# Altium PCB Sensor_Glove-X01.PcbDoc (part 1 of 4)
Units mm, origin at the board's own origin, x right, y up, seen from the top; angles counter-clockwise.
Board outline 58.67 x 37.59 mm, 2 copper layers (Top Layer, Bottom Layer), stack 1.711 mm thick; 126 components, 71 nets, 384 pads, 113 vias.
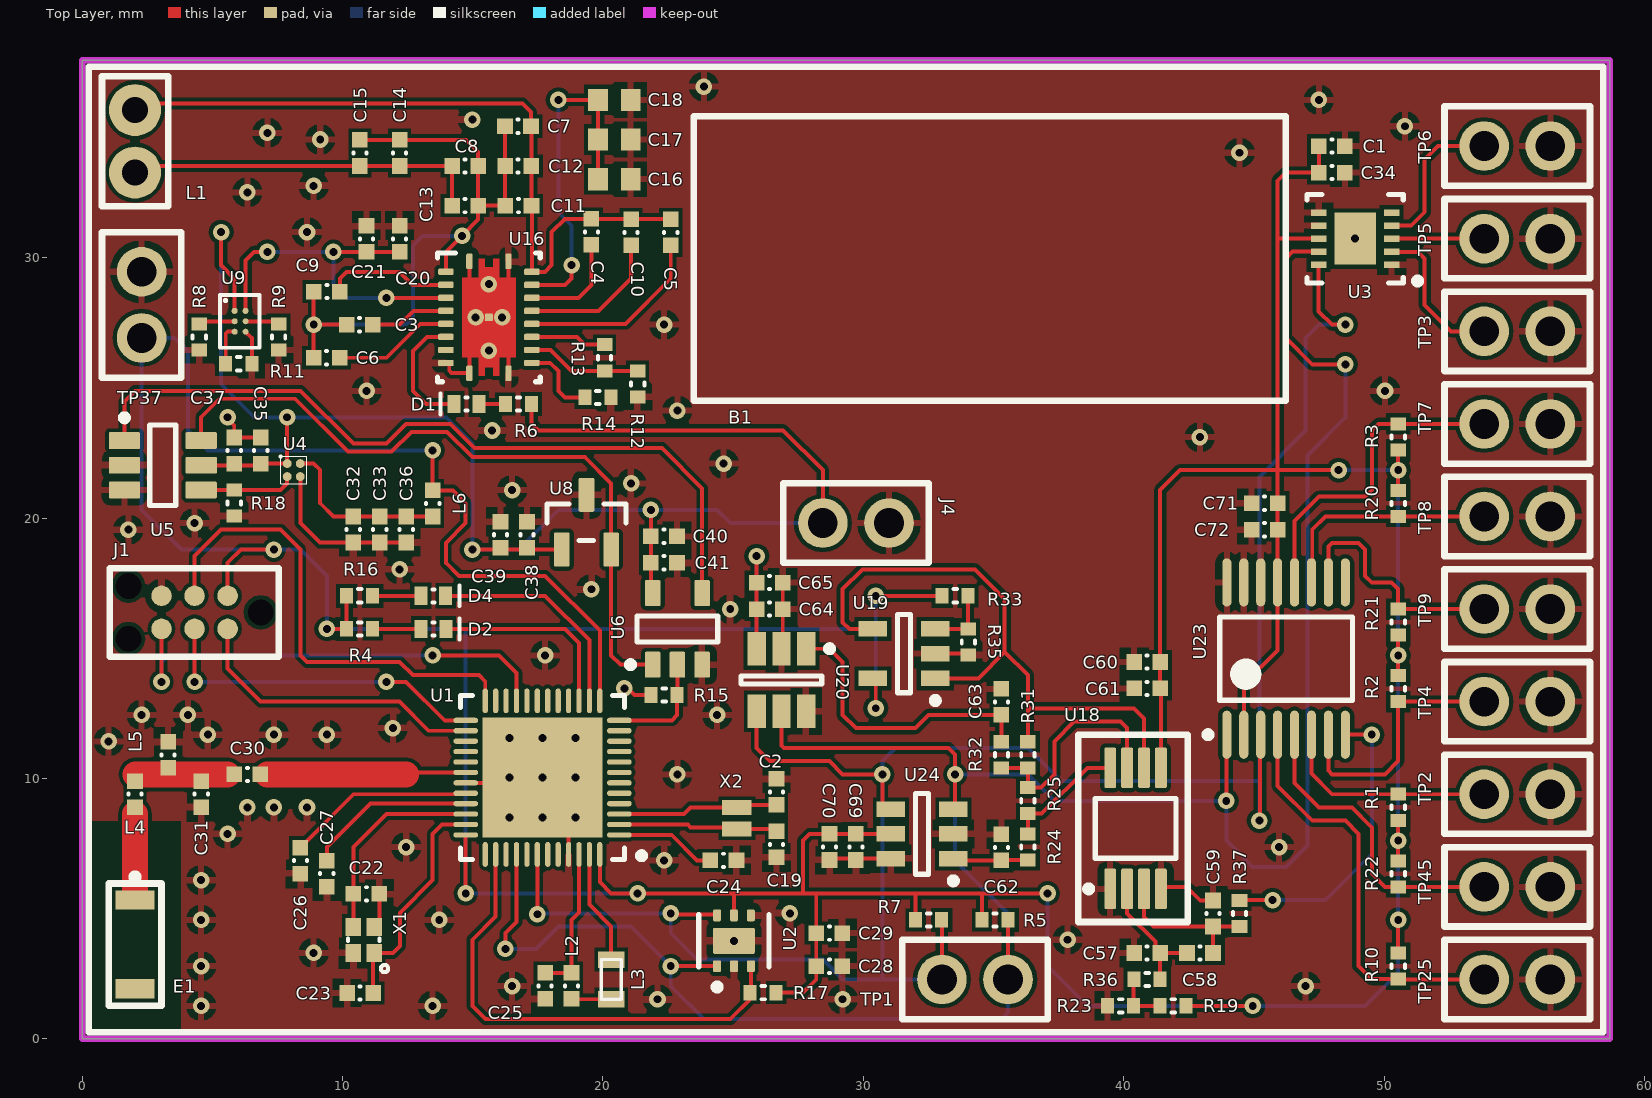
[diagram p0: Top Layer view]
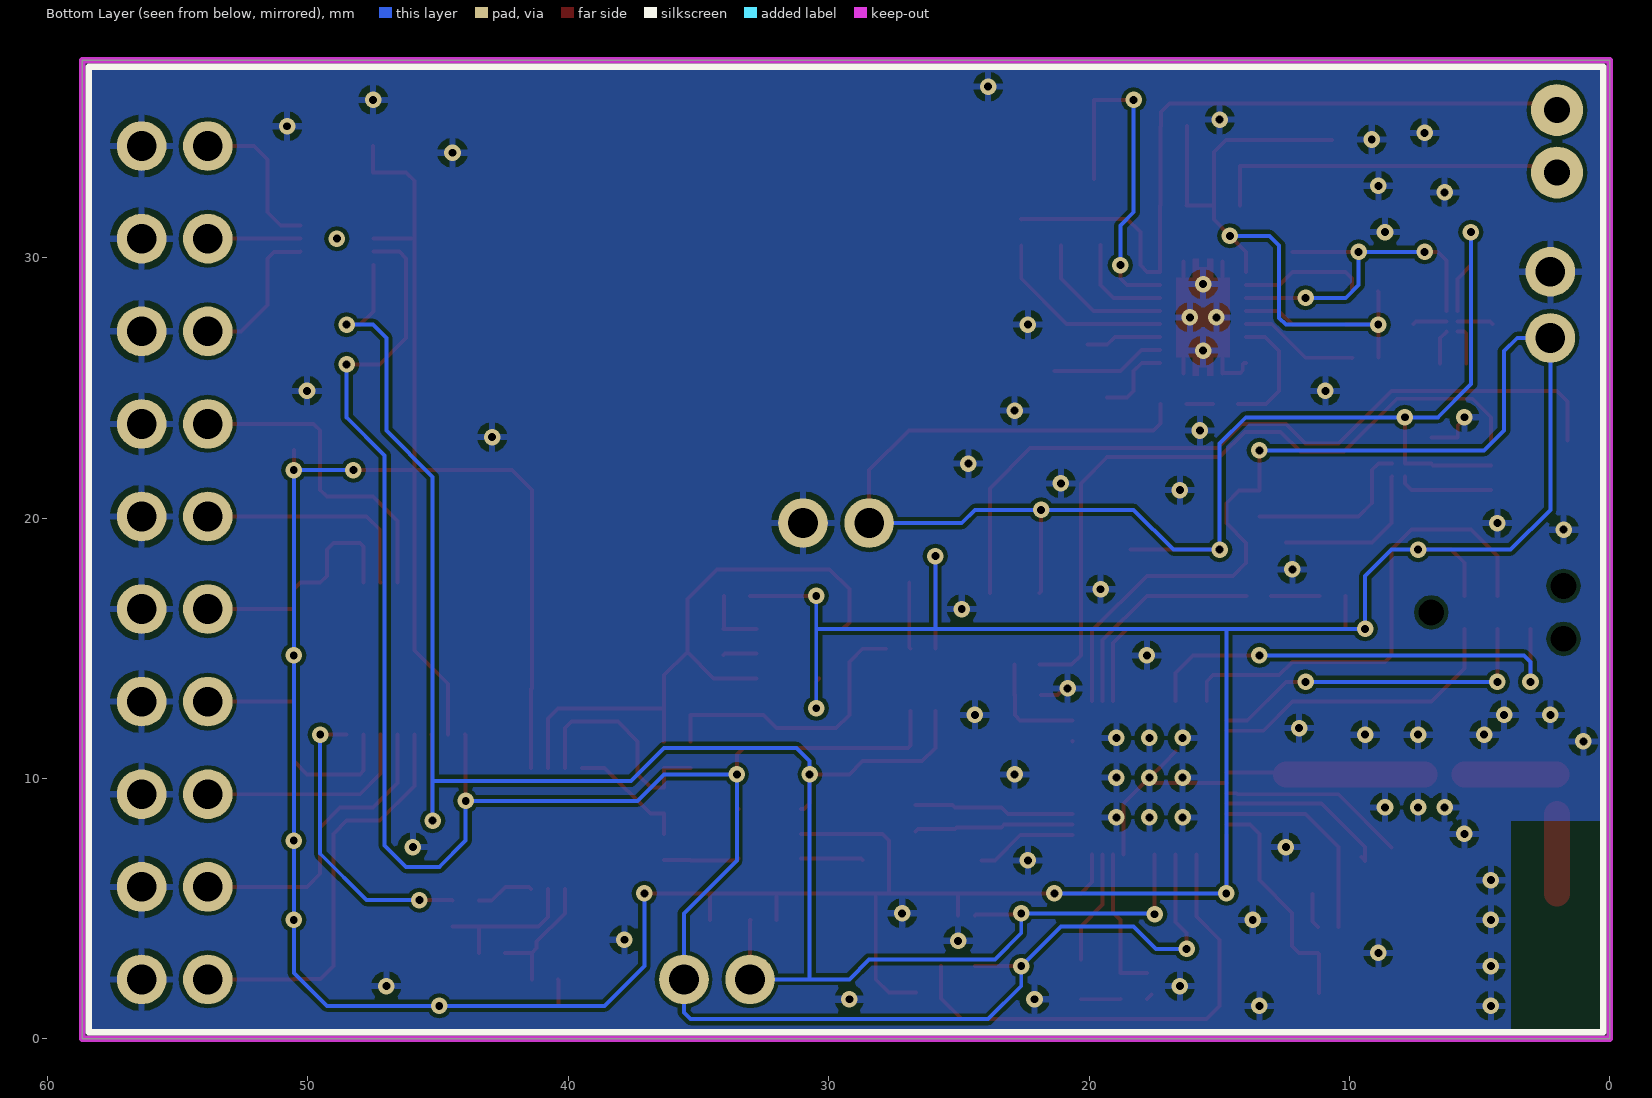
[diagram p1: Bottom Layer view, seen from below]
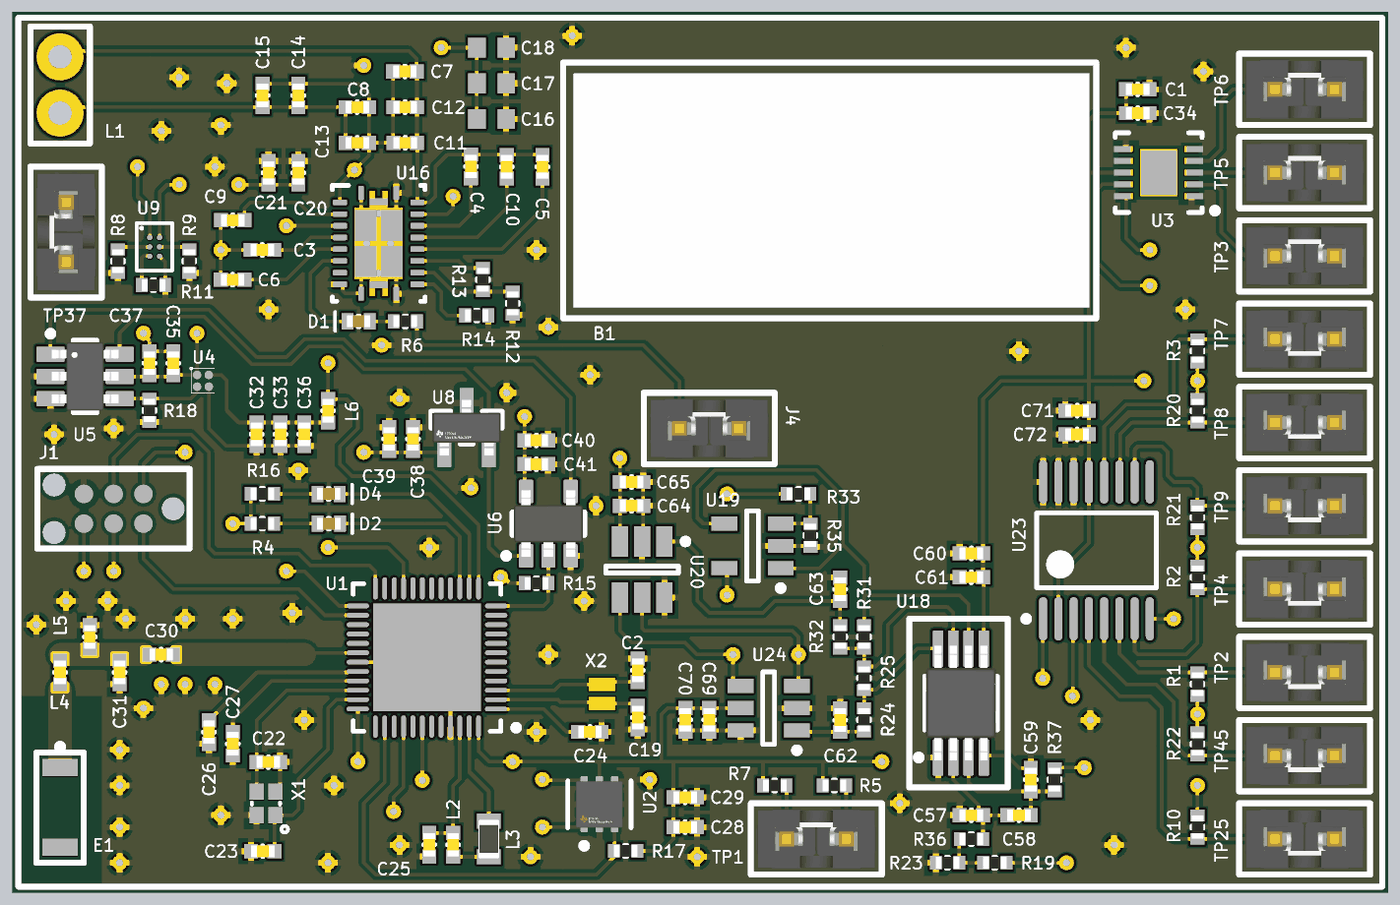
[diagram p3: 3D render of the assembled board from above, using the file's embedded part models]

## Layer stack, top to bottom
Top Solder: solder mask 0.0254, SM-001, Dk 4
Top Layer: signal copper 0.035
Dielectric 2: prepreg 0.0711, PP-006, Dk 4.1
Dielectric 1: core 1.4986, Core-043, Dk 4.3
Dielectric 3: prepreg 0.0711, PP-006, Dk 4.1
Bottom Layer: signal copper 0.035
Bottom Solder: solder mask 0.0254, SM-001, Dk 4

## Board outline
0,0 58.674,0 58.674,37.592 0,37.592

## Design rules (kind name [scope] priority, off if disabled: settings)
Clearance [All] p1: gap=0.152 ignorepadtopadclearanceinfootprint=FALSE
ComponentClearance [All] p1: gap=0.381 collisioncheckmode=3 verticalgap=0.254 showdistances=FALSE
HoleSize [All] p1: absolutevalues=TRUE maxlimit=5.08 minlimit=0.305 maxpercent=80.000 minpercent=20.000
MinimumSolderMaskSliver [All] p1: minsoldermaskwidth=0.152
PolygonConnect [All] p1: connectstyle=Relief reliefconductorwidth=0.254 reliefentries=4 polygonreliefangle="90 Angle" airgapwidth=0.254
RoutingVias [All] p1: holewidth=0.406 width=0.762 viastyle="Through Hole" minholewidth=0.305 minwidth=0.305 maxholewidth=2.54 maxwidth=1.27
SilkToSilkClearance [All] p1: silktosilkclearance=0.152
SilkToSolderMaskClearance [IsPad] p1: minsilkscreentomaskgap=0.152 clearancetoexposedcopper=TRUE
SolderMaskExpansion [All] p1: expansion=0.102 istentingtop=FALSE
UnRoutedNet [All] p1: checkbadconnections=TRUE
Width [All] p1: maxlimit=1.27 minlimit=0.152 preferedwidth=0.152
24 further rules are at their usual default settings.

## Classes and differential pairs
component class Sensor_Glove_Pheripherals-X01: C1 C34 TP3 TP5 TP6 U2 U3
component class Sensor_Glove_Sensors-X01: C57 C58 C59 C60 C61 C62 C63 C64 C65 C69 C70 C71 C72 R1 R2 R3 R10 R19 R20 R21 R22 R23 R24 R25 R31 R32 R33 R35 R36 R37 TP2 TP4 TP7 TP8 TP9 TP25 TP45 U18 U19 U20 U23 U24
component class Sensor_Glove_Power-X01: B1 C3 C4 C5 C6 C7 C8 C9 C10 C11 C12 C13 C14 C15 C16 C17 C18 C20 C21 C32 C33 C35 C36 C37 C38 C39 C40 C41 D1 J4 L1 L6 R6 R8 R9 R11 R12 R13 R14 R15 R18 TP37 U4 U5 U6 U8 U9 U16
component class Sensor_Glove_Main-X01: C2 C19 C22 C23 C24 C25 C26 C27 C28 C29 C30 C31 D2 D4 E1 J1 L2 L3 L4 L5 R4 R5 R7 R16 R17 TP1 U1 X1 X2

## Components (designator, comment, footprint, x,y, rotation, side; value= is the part's Value field where it differs from the comment)
B1 "40 mAh BATTERY" BATTERY 34.798,29.972 r270 top
C1 "1uF" C0402 47.998,34.29 r0 top
C2 "14pF" C0402 26.67,9.488 r270 top
C3 "470nF" C0402 10.66,27.432 r0 top
C4 "10nF" C0402 19.558,30.996 r270 top
C5 "22nF" C0402 22.606,30.98 r270 top
C6 "22nF" C0402 9.39,26.162 r0 top
C7 "68pF" C0402 16.74,35.052 r0 top
C8 "100nF" C0402 14.708,33.528 r0 top
C9 "10nF" C0402 9.398,28.702 r0 top
C10 "470nF" C0402 21.082,30.98 r270 top
C11 "2nF" C0402 16.756,32.004 r0 top
C12 "100pF" C0402 16.748,33.528 r0 top
C13 "10nF" C0402 14.708,32.004 r0 top
C14 "100nF" C0402 12.192,34.028 r90 top
C15 "4.7nF" C0402 10.668,34.028 r90 top
C16 "10uF" C0603 20.437,33.02 r0 top
C17 "10uF" C0603 20.437,34.544 r0 top
C18 "100nF" C0603 20.437,36.068 r0 top
C19 "14pF" C0402 26.67,7.472 r90 top
C20 "4.7uF" C0402 12.192,30.726 r270 top
C21 "4.7uF" C0402 10.922,30.726 r270 top
C22 "12pF" C0402 10.914,5.572 r0 top
C23 "12pF" C0402 10.676,1.762 r180 top
C24 "100nF" C0402 24.63,6.858 r0 top
C25 "1uF" C0402 17.78,2.04 r90 top
C26 "100pF" C0402 8.382,6.85 r270 top
C27 "100pF" C0402 9.398,6.35 r270 top
C28 "4.7uF" C0402 28.694,2.794 r0 top
C29 "100nF" C0402 28.694,4.064 r180 top
C30 "0.5pF" C0402 6.342,10.16 r180 top
C31 "2pF" C0402 4.572,9.398 r270 top
C32 "4.7uF" C0402 10.414,19.566 r270 top
C33 "1uF" C0402 11.43,19.566 r270 top
C34 "100nF" C0402 47.998,33.274 r0 top
C35 "1uF" C0402 6.858,22.598 r90 top
C36 "100nF" C0402 12.446,19.566 r90 top
C37 "100nF" C0402 5.842,22.598 r270 top
C38 "1uF" C0402 17.084,19.364 r90 top
C39 "100nF" C0402 16.068,19.364 r270 top
C40 "1uF" C0402 22.344,19.304 r0 top
C41 "100nF" C0402 22.344,18.288 r180 top
C57 "" C0402 40.902,3.302 r0 top
C58 "100nF" C0402 42.934,3.302 r0 top
C59 "" C0402 43.434,4.818 r90 top
C60 "1uF" C0402 40.902,14.478 r180 top
C61 "100nF" C0402 40.902,13.462 r180 top
C62 "100nF" C0402 35.306,7.358 r90 top
C63 "1uF" C0402 35.306,12.946 r90 top
C64 "1uF" C0402 26.408,16.51 r0 top
C65 "100nF" C0402 26.408,17.526 r0 top
C69 "1uF" C0402 29.718,7.374 r270 top
C70 "100nF" C0402 28.702,7.374 r270 top
C71 "1uF" C0402 45.414,20.574 r180 top
C72 "100nF" C0402 45.414,19.558 r180 top
D1 "Yellow" LED_0402 14.765,24.384 r180 top
D2 "Orange" LED_0402 13.495,15.748 r0 top
D4 "Red" LED_0402 13.487,17.018 r0 top
E1 "2450AT18B100" 2450AT18B100 2.032,5.334 r270 top
J1 "J-LINK 6-PIN NEEDLE ADAPTER" "J-LINK 6 PIN NEEDLE" 6.858,16.383 r180 top
J4 "JUMPER WITH 40 mAh BATTERY" JUMPER_BATTERY 28.448,19.812 r0 top
L1 "WIRELESS CHARGING COIL, RECEIVER" 760308101219 2.032,35.674 r0 top
L2 "15nH" L0402 18.796,2.04 r270 top
L3 "10uH" L0603 20.32,2.286 r90 top
L4 "9nH" L0402 2.032,9.398 r270 top
L5 "2nH" L0402 3.302,10.914 r270 top
L6 "1uH" L0402 13.462,20.566 r90 top
R1 "" R0402 50.546,8.898 r90 top
R2 "" R0402 50.546,13.454 r270 top
R3 "" R0402 50.546,23.122 r90 top
R4 "422R" R0402 10.66,15.748 r0 top
R5 "3.3kR" R0402 35.06,4.572 r0 top
R6 "464R" R0402 16.756,24.384 r0 top
R7 "3.3kR" R0402 32.512,4.572 r0 top
R8 "10kR" R0402 4.499,26.955 r90 top
R9 "3.3kR" R0402 7.547,26.955 r90 top
R10 "" R0402 50.546,2.794 r270 top
R11 "10kR" R0402 6.015,25.931 r180 top
R12 "10kR" R0402 21.336,25.154 r270 top
R13 "20kR" R0402 20.066,26.162 r270 top
R14 "2kR" R0402 19.804,24.638 r0 top
R15 "1MR" R0402 22.352,13.208 r0 top
R16 "422R" R0402 10.66,17.018 r0 top
R17 "3.3kR" R0402 26.154,1.778 r180 top
R18 "1MR" R0402 5.842,20.582 r270 top
R19 "" R0402 41.902,1.27 r180 top
R20 "" R0402 50.546,20.566 r270 top
R21 "" R0402 50.546,16.01 r90 top
R22 "" R0402 50.546,6.342 r270 top
R23 "" R0402 39.886,1.27 r180 top
R24 "0mR" R0402 36.322,7.374 r270 top
R25 "" R0402 36.322,9.152 r270 top
R31 "" R0402 36.322,10.914 r270 top
R32 "0mR" R0402 35.306,10.914 r90 top
R33 "100kR" R0402 33.528,17.018 r0 top
R35 "100kR" R0402 34.036,15.248 r270 top
R36 "0mR" R0402 40.902,2.286 r0 top
R37 "0mR" R0402 44.45,4.818 r270 top
TP1 "JUMPER" JUMPER 33.02,2.286 r0 top
TP2 "JUMPER" JUMPER 56.388,9.398 r180 top
TP3 "JUMPER" JUMPER 53.848,27.178 r0 top
TP4 "JUMPER" JUMPER 56.388,12.954 r180 top
TP5 "JUMPER" JUMPER 53.848,30.734 r0 top
TP6 "JUMPER" JUMPER 53.848,34.29 r0 top
TP7 "JUMPER" JUMPER 56.388,23.622 r180 top
TP8 "JUMPER" JUMPER 56.388,20.066 r180 top
TP9 "JUMPER" JUMPER 56.388,16.51 r180 top
TP25 "JUMPER" JUMPER 56.388,2.286 r180 top
TP37 "JUMPER" JUMPER 2.286,26.924 r90 top
TP45 "JUMPER" JUMPER 56.388,5.842 r180 top
U1 "NRF52832-QFAA-R7" NRF52832-QFAA-R7 17.682,10.036 r0 top
U2 "TMP117AIDRVR" TMP117AIDRVR 25.034,3.769 r0 top
U3 "4 CHANNEL CDC" "WSON-10 3X3MM" 48.892,30.734 r180 top
U4 "ADP160" ADP160 8.124,21.848 r0 top
U5 "SN74LVC1G57DBVR" DBV0006A_M 3.097,22.032 r0 top
U6 "SN74LVC1G80DBVR" DBV0005A_N 22.86,15.748 r90 top
U8 "DRV5032FBDBZR" FP-DBZ0003A-MFG 19.37,19.846 r90 top
U9 "BQ25100YFPT" YZP0006 6.057,27.563 r0 top
U16 "BQ51013BRHLR" BQ51013BRHLR 15.622,27.714 r270 top
U18 "Instrumentation Amplifier" 8-MSOP 40.457,8.089 r90 top
U19 "AD8505ARJZ-R7" ADI-RJ-5_N 31.566,14.798 r180 top
U20 "DAC5571IDBVT" TI-DBV6_M 26.858,13.786 r270 top
U23 "ADG728BRUZ" ADI-RU-16_M 46.239,14.609 r90 top
U24 "ADS1100A1IDBVT" TI-DBV6_N 32.258,7.874 r180 top
X1 "32MHz" CRYSTAL_1MM6_X_1MM2 10.814,3.802 r90 top
X2 "32.768 kHz" CRYSTAL_1MM2_X_1MM0 25.146,8.48 r270 top

## Footprints (in the part's own frame and the unit in brackets; to place one, negate y for a bottom-side part, rotate by r counter-clockwise, add the part's x,y. Pads: shape width x height; smd on the part's side, far side on the other; paste and mask are expansions set on the pad)
8-MSOP [mm] "TSOP, 8-Leads, Body 3.1x3.1mm, Pitch 0.65mm, IPC Low Density"
  rrect22% 1.55x0.45 smd: 1(-2.325,0.975) 2(-2.325,0.325) 3(-2.325,-0.325) 4(-2.325,-0.975) 5(2.325,-0.975) 6(2.325,-0.325) 7(2.325,0.325) 8(2.325,0.975)
  silkscreen extent -3.6,-2 3.6,2.2, body extent -2.45,-1.5 2.45,1.5, height 0.94
2450AT18B100 [mm] "2.4GHz Mini Antenna SMD, 50 ohm Resistence"
  rect 0.74x1.5 smd mask+0.03: 1(0,0) 2(3.406,0)
  silkscreen extent -1.02,-1.02 4.06,1.02, body extent -0.05,-0.9 3.35,0.9, height 1.4
760308101219 [mm] "WE-WPCC WIRELESS POWER TRANSFER RECEIVER COIL"
  round 2 hole 1: 1(0,0) 2(0,-2.4)
  silkscreen extent -1.27,-3.7 1.27,1.3
ADI-RJ-5_N [mm] "SOT-23, 5-Leads, Body 2.9x1.6mm, Pitch 0.95mm, IPC Medium Density"
  rect 1.1x0.6 smd: 1(-1.2,0.95) 2(-1.2,0) 3(-1.2,-0.95) 4(1.2,-0.95) 5(1.2,0.95)
  silkscreen extent -1.33,-1.5 0.25,1.92, body extent -0.85,-1.5 0.85,1.5, height 1.45
ADI-RU-16_M [mm] "SOP, 16-Leads, Body 5x4.4mm, Pitch 0.65mm, IPC Low Density"
  oval 1.85x0.35 smd: 1(-2.925,2.275) 2(-2.925,1.625) 3(-2.925,0.975) 4(-2.925,0.325) 5(-2.925,-0.325) 6(-2.925,-0.975) 7(-2.925,-1.625) 8(-2.925,-2.275) 9(2.925,-2.275) 10(2.925,-1.625) 11(2.925,-0.975) 12(2.925,-0.325) 13(2.925,0.325) 14(2.925,0.975) 15(2.925,1.625) 16(2.925,2.275)
  silkscreen extent -3.05,-2.55 1.6,3.12, body extent -2.25,-2.55 2.25,2.55, height 1.2
ADP160 [mm] "4-Ball WLCSP, CB-4-4"
  round 0.34 smd paste+0.01 mask+0.01: A1(-0.25,0.25) A2(0.25,0.25) B1(-0.25,-0.25) B2(0.25,-0.25)
  silkscreen extent -0.55,-0.53 0.5,0.57, body extent -0.48,-0.48 0.48,0.48, height 0.69
BATTERY [mm]
  silkscreen extent -5.46,-11.3 5.46,11.43, body extent -5,-10.87 5,11.13, height 3
BQ51013BRHLR [mm]
  rrect42% 0.6x0.24 smd: 1(-2.15,-0.75) 10(2.15,-0.75) 11(2.15,0.75) 20(-2.15,0.75)
  rrect42% 0.24x0.6 smd: 2(-1.75,-1.65) 3(-1.25,-1.65) 4(-0.75,-1.65) 5(-0.25,-1.65) 6(0.25,-1.65) 7(0.75,-1.65) 8(1.25,-1.65) 9(1.75,-1.65) 12(1.75,1.65) 13(1.25,1.65) 14(0.75,1.65) 15(0.25,1.65) 16(-0.25,1.65) 17(-0.75,1.65) 18(-1.25,1.65) 19(-1.75,1.65)
  rrect33% 0.3x0.3 smd paste-0.15 mask+0: 21(0,0)
  Top Layer region: -2.25,0.16 -1.925,0.16 -1.925,-0.16 -2.25,-0.16 -2.25,-0.39 -1.525,-0.39 -1.525,-1.025 1.525,-1.025 1.525,-0.39 2.25,-0.39 2.25,-0.16 1.925,-0.16 1.925,0.16 2.25,0.16 2.25,0.39 1.525,0.39 1.525,1.025 -1.525,1.025 -1.525,0.39 -2.25,0.39
  silkscreen extent -2.47,-1.98 2.47,1.97, body extent -2.32,-1.83 2.33,1.83, height 1.01
C0402 [mm]
  rect 0.6x0.6 smd: 1(-0.5,0) 2(0.5,0)
  silkscreen extent -0.02,-0.25 0.02,0.25, body extent -0.5,-0.25 0.5,0.25, height 0.55
C0603 [mm]
  rect 0.75x0.85 smd: 1(-0.625,0) 2(0.625,0)
  body extent -0.85,-0.45 0.85,0.45, height 0.9
CRYSTAL_1MM2_X_1MM0 [mm] "Crystal 1.2 x 1.0 x 0.35mm"
  rect 0.575x1.14 smd paste-0.5 mask+0.06: 1(-0.41,0) 2(0.41,0)
  body extent -0.6,-0.5 0.6,0.5, height 0.35
CRYSTAL_1MM6_X_1MM2 [mm] "1.6 x 1.2 x 0.35mm 4-pin crystal"
  rect 0.7x0.6 smd mask+0.036: 1(-0.5,-0.4) 2(0.5,-0.4) 3(0.5,0.4) 4(-0.5,0.4)
  silkscreen extent -1.24,-0.94 0.05,0.6, body extent -0.8,-0.6 0.8,0.6, height 0.35
DBV0005A_N [mm] "SOT23, 5-Leads, Body 3.05x1.75mm, Pitch 0.95mm, IPC Medium Density"
  rrect17% 1x0.6 smd: 1(-1.375,0.95) 2(-1.375,0) 3(-1.375,-0.95) 4(1.375,-0.95) 5(1.375,0.95)
  silkscreen extent -1.5,-1.55 0.5,1.92, body extent -1.42,-1.46 1.42,1.46, height 1.08
DBV0006A_M [mm] "SOT23, 6-Leads, Body 3.05x1.75mm, Pitch 0.95mm, IPC Low Density"
  rrect15% 1.2x0.65 smd: 1(-1.475,0.95) 2(-1.475,0) 3(-1.475,-0.95) 4(1.475,-0.95) 5(1.475,0) 6(1.475,0.95)
  silkscreen extent -1.6,-1.55 0.5,1.95, body extent -1.42,-1.46 1.42,1.46, height 1.11
FP-DBZ0003A-MFG [mm]
  rrect17% 1.3x0.6 smd paste+0 mask+0: 1(-1.05,0.95) 2(-1.05,-0.95) 3(1.05,0)
  silkscreen extent -0.7,-1.52 0.7,1.52, body extent -1.8,-1.62 1.8,1.62, height 0.25
"J-LINK 6 PIN NEEDLE" [mil] "J-LINK 6 PIN NEEDLE ADAPTER"
  round 30.98 smd mask+0: 1(50,-25) 2(50,25) 3(100,-25) 4(100,25) 5(150,-25) 6(150,25)
  round 0 hole 39.02 unplated mask+0: 7(0,0) 7(200,-40) 7(200,40)
  silkscreen extent -28,-67 228,67
JUMPER [mil]
  round 75 hole 45: 1(0,0) 2(100,0)
  silkscreen extent -60,-60 160,60, body extent -50,-50 150,50, height 343
JUMPER_BATTERY [mil]
  round 75 hole 45: 1(0,0) 2(100,0)
  silkscreen extent -60,-60 160,60, body extent -50,-50 150,50, height 343
L0402 [mm]
  rect 0.6x0.6 smd: 1(-0.5,0) 2(0.5,0)
  silkscreen extent -0.02,-0.25 0.02,0.25, body extent -0.5,-0.25 0.5,0.25, height 0.55
L0603 [mil] "surface mount inductor 0603"
  rect 25x40 smd: 1(-30,0) 2(30,0)
  silkscreen extent -30,-15 30,15, body extent -31,-16 32,16, height 39
LED_0402 [mm] "0402 w/ LED mark"
  rect 0.5x0.7 smd: A(-0.475,0) K(0.475,0)
  silkscreen extent -0.04,-0.4 1,0.4, body extent -0.5,-0.25 0.5,0.25, height 0.35
NRF52832-QFAA-R7 [mm]
  oval 0.95x0.2 smd: 1(2.95,-2.2) 2(2.95,-1.8) 3(2.95,-1.4) 4(2.95,-1) 5(2.95,-0.6) 6(2.95,-0.2) 7(2.95,0.2) 8(2.95,0.6) 9(2.95,1) 10(2.95,1.4) 11(2.95,1.8) 12(2.95,2.2) 25(-2.95,2.2) 26(-2.95,1.8) 27(-2.95,1.4) 28(-2.95,1) 29(-2.95,0.6) 30(-2.95,0.2) 31(-2.95,-0.2) 32(-2.95,-0.6) 33(-2.95,-1) 34(-2.95,-1.4) 35(-2.95,-1.8) 36(-2.95,-2.2)
  oval 0.2x0.95 smd: 13(2.2,2.95) 14(1.8,2.95) 15(1.4,2.95) 16(1,2.95) 17(0.6,2.95) 18(0.2,2.95) 19(-0.2,2.95) 20(-0.6,2.95) 21(-1,2.95) 22(-1.4,2.95) 23(-1.8,2.95) 24(-2.2,2.95) 37(-2.2,-2.95) 38(-1.8,-2.95) 39(-1.4,-2.95) 40(-1,-2.95) 41(-0.6,-2.95) 42(-0.2,-2.95) 43(0.2,-2.95) 44(0.6,-2.95) 45(1,-2.95) 46(1.4,-2.95) 47(1.8,-2.95) 48(2.2,-2.95)
  rect 4.6x4.6 smd: 49(0,0)
  silkscreen extent -3.15,-3.15 3.92,3.15, body extent -3,-3 3,3, height 0.9
R0402 [mm]
  rect 0.5x0.6 smd: 1(-0.5,0) 2(0.5,0)
  silkscreen extent -0.06,-0.25 0.06,0.25, body extent -0.5,-0.25 0.5,0.25, height 0.35
TI-DBV6_M [mm] "SOT23, 6-Leads, Body 2.9x1.6mm, Pitch 0.95mm, IPC Low Density"
  rect 1.3x0.7 smd: 1(-1.2,0.95) 2(-1.2,0) 3(-1.2,-0.95) 4(1.2,-0.95) 5(1.2,0) 6(1.2,0.95)
  silkscreen extent -1.32,-1.55 0.15,1.98, body extent -0.87,-1.52 0.87,1.53, height 1.45
TI-DBV6_N [mm] "SOT23, 6-Leads, Body 2.9x1.6mm, Pitch 0.95mm, IPC Medium Density"
  rect 1.1x0.6 smd: 1(-1.2,0.95) 2(-1.2,0) 3(-1.2,-0.95) 4(1.2,-0.95) 5(1.2,0) 6(1.2,0.95)
  silkscreen extent -1.33,-1.55 0.25,1.92, body extent -0.87,-1.52 0.87,1.53, height 1.45
TMP117AIDRVR [mm]
  rrect33% 0.3x0.45 smd paste+0 mask+0: 1(-0.65,-0.975) 2(0,-0.975) 3(0.65,-0.975) 4(0.65,0.975) 5(0,0.975) 6(-0.65,0.975)
  rrect10% 1.6x1 smd paste-1000 mask+0: 7(0,0)
  silkscreen extent -1.35,-1.9 1.35,1, body extent -1.15,-1.3 1.15,1.3, height 0.25
"WSON-10 3X3MM" [mm] "SON, 10-Leads, Body 3x3 mm, Pitch 0.5mm"
  rect 0.6x0.25 smd paste-0.125 mask+0.051: 1(-1.4,1) 2(-1.4,0.5) 3(-1.4,0) 4(-1.4,-0.5) 5(-1.4,-1) 6(1.4,-1) 7(1.4,-0.5) 8(1.4,0) 9(1.4,0.5) 10(1.4,1)
  rect 1.6x2 smd paste-0.05 mask+0.051: 11(0,0)
  silkscreen extent -2.53,-1.7 1.85,1.75, body extent -1.55,-1.55 1.55,1.55, height 0.8
YZP0006 [mm] "BGA, 6-Balls, Body 1.388x0.888mm, Pitch 0.4mm"
  round 0.23 smd mask+0.05: A1(-0.2,0.4) A2(0.22,0.4) B1(-0.2,0) B2(0.22,0) C1(-0.2,-0.4) C2(0.22,-0.4)
  silkscreen extent -0.76,-1.02 0.76,1.02, body extent -0.45,-0.69 0.45,0.69, height 0.5

## Part data
B1: library part BATTERY, "Lithium Battery 3.7V 40mAh Rechargeable", Capacity=40mAh, Manufacturer=SparkFun, Manufacturer Part Number=PRT-13852, Supplier Part Number 1=1568-1496-ND, Voltage Rating=3.7V, ComponentLink1Description=http://cdn.sparkfun.com/datasheets/Prototyping/SPE-00-301120-40mah-en-1.0ver.pdf?src-supplier=Digi-Key, ComponentLink1URL=http://cdn.sparkfun.com/datasheets/Prototyping/SPE-00-301120-40mah-en-1.0ver.pdf?src-supplier=Digi-Key, Pricing 1="1=4.50000 (USD)", RoHS=No, Stock 1=237, Supplier 1=Digi-Key, Termination=Connector, Weight=5g
C1 C60 C63 C64 C69 C71: library part C-0402(1005), "Ceramic Capacitor, Multilayer, Ceramic, 6.3V, 20% +Tol, 20% -Tol, X5R, 15% TC, 1uF, Surface Mount, 0402", Case Code (Imperial)=0402, Case Code (Metric)=1005, Dielectric=X5R, Manufacturer=Yageo, Manufacturer Part Number=CC0402MRX5R5BB105, Max Operating Temperature=85°C, Min Operating Temperature=-55°C, Package Quantity=1, Resistor Type=Ceramic, Supplier Part Number 1=311-1441-1-ND, Tolerance=20%, Voltage Rating=6.3V, Capacitance=1uF, Case/Package=0402, Category="Ceramic Capacitors", ComponentLink1Description=https://datasheet.ciiva.com/169/product-169683.pdf, ComponentLink1URL=https://datasheet.ciiva.com/169/product-169683.pdf, ComponentLink2Description=https://datasheet.ciiva.com:443/pdfs/VipMasterIC/IC/YAGO/YAGO-S-A0006851646/YAGO-S-A0006851646-1.pdf?src-supplier=IHS+Markit, ComponentLink2URL=https://datasheet.ciiva.com:443/pdfs/VipMasterIC/IC/YAGO/YAGO-S-A0006851646/YAGO-S-A0006851646-1.pdf?src-supplier=IHS+Markit, ComponentLink3Description=https://datasheet.ciiva.com/176/mlccorderingcode-176806.pdf?src-supplier=Digi-Key, ComponentLink3URL=https://datasheet.ciiva.com/176/mlccorderingcode-176806.pdf?src-supplier=Digi-Key, ComponentLink4Description=https://datasheet.ciiva.com/176/mlccorderingcode-176807.pdf?src-supplier=Digi-Key, ComponentLink4URL=https://datasheet.ciiva.com/176/mlccorderingcode-176807.pdf?src-supplier=Digi-Key, ComponentLink5Description=https://datasheet.ciiva.com/176/mlccorderingcode-176808.pdf?src-supplier=Digi-Key, ComponentLink5URL=https://datasheet.ciiva.com/176/mlccorderingcode-176808.pdf?src-supplier=Digi-Key, Depth=0.5mm, Dissipation Factor=10%, Halogen Free="Halogen Free", Height=0.5mm, Lead Free="Lead Free", Length=1mm, Mount="Surface Mount", Number of Pins=2, Packaging="Tape and Reel", Pricing 1="1=0.12000, 10=0.08500, 50=0.04860, 100=0.04020, 500=0.02818, 1000=0.02333, 2500=0.02172, 5000=0.01987 (USD)", RoHS=Yes, Stock 1=4097, Supplier 1=Digi-Key, Termination=SMD/SMT, Thickness=0.022inch, Voltage Rating (DC)=6.3V, Width=0.5mm
C2 C19: library part C-0402(1005), "Ceramic Capacitor, Multilayer, Ceramic, 50V, 1% +Tol, 1% -Tol, C0G, 30ppm/Cel TC, 0.000014uF, Surface Mount, 0402", Case Code (Imperial)=0402, Case Code (Metric)=1005, Dielectric=C0G, Manufacturer="Kyocera AVX", Manufacturer Part Number=04025U140FAT2A, Max Operating Temperature=125°C, Min Operating Temperature=-55°C, Package Quantity=10000, Supplier Part Number 1=478-10139-1-ND, Tolerance=1%, Voltage Rating=50V, Capacitance=14pF, Case/Package=0402, Category="Ceramic Capacitors", ComponentLink1Description=https://datasheet.ciiva.com/169/product-169683.pdf, ComponentLink1URL=https://datasheet.ciiva.com/169/product-169683.pdf, ComponentLink2Description=https://datasheet.ciiva.com:443/pdfs/VipMasterIC/IC/AVXC/AVXC-S-A0001948465/AVXC-S-A0001948465-1.pdf?src-supplier=IHS+Markit, ComponentLink2URL=https://datasheet.ciiva.com:443/pdfs/VipMasterIC/IC/AVXC/AVXC-S-A0001948465/AVXC-S-A0001948465-1.pdf?src-supplier=IHS+Markit, ComponentLink3Description=https://datasheet.ciiva.com/6269/useries-6269558.pdf?src-supplier=Digi-Key, ComponentLink3URL=https://datasheet.ciiva.com/6269/useries-6269558.pdf?src-supplier=Digi-Key, ComponentLink4Description=https://datasheet.ciiva.com/11568/useries-11568551.pdf?src-supplier=Avnet, ComponentLink4URL=https://datasheet.ciiva.com/11568/useries-11568551.pdf?src-supplier=Avnet, Composition=Ceramic, Depth=0.5mm, Length=1mm, Mount="Surface Mount", Packaging="Tape and Reel", Pricing 1="1=0.35000, 10=0.24100, 100=0.14460, 500=0.10846, 1000=0.09158, 2500=0.08676, 5000=0.08194 (USD)", Radiation Hardening=No, RoHS=Yes, Stock 1=25036, Supplier 1=Digi-Key, Termination=SMD/SMT, Thickness=0.022inch, Voltage Rating (DC)=50V, Width=0.5mm
C3 C10: library part C-0402(1005), "Ceramic Capacitor, Multilayer, Ceramic, 25V, 20% +Tol, 20% -Tol, X5R, 15% TC, 0.47uF, Surface Mount, 0402", Case Code (Imperial)=0402, Case Code (Metric)=1005, Manufacturer=Murata, Manufacturer Part Number=GRT155R61E474ME01D, Max Operating Temperature=85°C, Min Operating Temperature=-55°C, Ratings=AEC-Q200, Supplier Part Number 1=490-12270-1-ND, Tolerance=20%, Voltage Rating=25V, Capacitance=470nF, Case/Package=0402, Category="Ceramic Capacitors", ComponentLink1Description=https://datasheet.ciiva.com/169/product-169683.pdf, ComponentLink1URL=https://datasheet.ciiva.com/169/product-169683.pdf, ComponentLink2Description=https://datasheet.ciiva.com:443/pdfs/VipMasterIC/IC/MURE/MURE-S-A0004410517/MURE-S-A0004410723-1.pdf?src-supplier=IHS+Markit, ComponentLink2URL=https://datasheet.ciiva.com:443/pdfs/VipMasterIC/IC/MURE/MURE-S-A0004410517/MURE-S-A0004410723-1.pdf?src-supplier=IHS+Markit, ComponentLink3Description=http://search.murata.co.jp/Ceramy/image/img/A01X/G101/ENG/GRT155R61E474ME01-01.pdf?src-supplier=Digi-Key, ComponentLink3URL=http://search.murata.co.jp/Ceramy/image/img/A01X/G101/ENG/GRT155R61E474ME01-01.pdf?src-supplier=Digi-Key, Length=0.039inch, Mount="Surface Mount", Packaging="Tape and Reel", Pricing 1="1=0.12000, 10=0.08400, 100=0.03930, 500=0.02754, 1000=0.02280, 2500=0.02122, 5000=0.01941 (USD)", RoHS=Yes, Stock 1=59550, Supplier 1=Digi-Key, Thickness=0.022inch, Width=0.02inch
C4 C9: library part C-0402(1005), "Ceramic Capacitor, Multilayer, Ceramic, 25V, 5% +Tol, 5% -Tol, X7R, 15% TC, 0.01uF, Surface Mount, 0402", Case Code (Imperial)=0402, Case Code (Metric)=1005, Dielectric=X7R, Dielectric Material=Ceramic, Manufacturer=KEMET, Manufacturer Part Number=C0402C103J3RACTU, Max Operating Temperature=125°C, Min Operating Temperature=-55°C, Package Quantity=1, Supplier Part Number 1=399-1279-1-ND, Tolerance=5%, Voltage=25V, Capacitance=10nF, Case/Package=0402, Category="Ceramic Capacitors", ComponentLink1Description=https://datasheet.ciiva.com/169/product-169683.pdf, ComponentLink1URL=https://datasheet.ciiva.com/169/product-169683.pdf, ComponentLink2Description=https://datasheet.ciiva.com:443/pdfs/VipMasterIC/IC/KEME/KEME-S-A0008991654/KEME-S-A0008991654-1.pdf?src-supplier=IHS+Markit, ComponentLink2URL=https://datasheet.ciiva.com:443/pdfs/VipMasterIC/IC/KEME/KEME-S-A0008991654/KEME-S-A0008991654-1.pdf?src-supplier=IHS+Markit, ComponentLink3Description=https://datasheet.ciiva.com/7747/1732724-7747610.pdf?src-supplier=Element14, ComponentLink3URL=https://datasheet.ciiva.com/7747/1732724-7747610.pdf?src-supplier=Element14, ComponentLink4Description=https://datasheet.ciiva.com/14603/70095383-14603973.pdf?src-supplier=Allied+Electronics, ComponentLink4URL=https://datasheet.ciiva.com/14603/70095383-14603973.pdf?src-supplier=Allied+Electronics, ComponentLink5Description=https://datasheet.ciiva.com/14607/70095383-14607438.pdf?src-supplier=Allied+Electronics, ComponentLink5URL=https://datasheet.ciiva.com/14607/70095383-14607438.pdf?src-supplier=Allied+Electronics, Depth=0.5mm, Dissipation Factor=3.5%, Height=0.5mm, Lead Pitch=0.3mm, Length=1mm, Mount="Surface Mount,PCB", Number of Pins=2, Packaging="Tape and Reel", Pricing 1="1=0.10000, 10=0.05300, 100=0.02360, 500=0.01682, 1000=0.01322, 2500=0.01202, 5000=0.01106 (USD)", Radiation Hardening=No, REACH SVHC="No SVHC", RoHS=Yes, Stock 1=2324889, Supplier 1=Digi-Key, Termination=SMD/SMT, Thickness=0.022inch, Voltage Rating=25V, Voltage Rating (DC)=25V, Width=0.02inch
C5 C6: library part C-0402(1005), "Ceramic Capacitor, Multilayer, Ceramic, 25V, 10% +Tol, 10% -Tol, X7R, 15% TC, 0.022uF, Surface Mount, 0402", Case Code (Imperial)=0402, Case Code (Metric)=1005, Dielectric=X7R, Manufacturer=Murata, Manufacturer Part Number=GRM155R71E223KA61D, Max Operating Temperature=125°C, Min Operating Temperature=-55°C, Package Quantity=1, Supplier Part Number 1=490-3252-1-ND, Tolerance=10%, Voltage=25V, Capacitance=22nF, Case/Package=0402, Category="Ceramic Capacitors", ComponentLink1Description=https://datasheet.ciiva.com/169/product-169683.pdf, ComponentLink1URL=https://datasheet.ciiva.com/169/product-169683.pdf, ComponentLink2Description=https://datasheet.ciiva.com:443/pdfs/VipMasterIC/IC/MURE/MURE-S-A0004362469/MURE-S-A0004364485-1.pdf?src-supplier=IHS+Markit, ComponentLink2URL=https://datasheet.ciiva.com:443/pdfs/VipMasterIC/IC/MURE/MURE-S-A0004362469/MURE-S-A0004364485-1.pdf?src-supplier=IHS+Markit, ComponentLink3Description=https://datasheet.ciiva.com/131/product-131108.pdf?src-supplier=Digi-Key, ComponentLink3URL=https://datasheet.ciiva.com/131/product-131108.pdf?src-supplier=Digi-Key, ComponentLink4Description=https://datasheet.ciiva.com/131/grm155r71e223ka61-01-131110.pdf?src-supplier=Digi-Key, ComponentLink4URL=https://datasheet.ciiva.com/131/grm155r71e223ka61-01-131110.pdf?src-supplier=Digi-Key, ComponentLink5Description=https://datasheet.ciiva.com/18184/getdatasheetpartid-178879-18184701.pdf?src-supplier=Verical, ComponentLink5URL=https://datasheet.ciiva.com/18184/getdatasheetpartid-178879-18184701.pdf?src-supplier=Verical, ComponentLink6Description=https://datasheet.ciiva.com/14103/grmseries-highdielectrictype-eng-14103752.pdf?src-supplier=Distrelec, ComponentLink6URL=https://datasheet.ciiva.com/14103/grmseries-highdielectrictype-eng-14103752.pdf?src-supplier=Distrelec, ComponentLink7Description=https://datasheet.ciiva.com/5414/product-5414091.pdf?src-supplier=Mouser, ComponentLink7URL=https://datasheet.ciiva.com/5414/product-5414091.pdf?src-supplier=Mouser, ComponentLink8Description=https://datasheet.ciiva.com/16396/product-16396813.pdf?src-supplier=Future+Electronics, ComponentLink8URL=https://datasheet.ciiva.com/16396/product-16396813.pdf?src-supplier=Future+Electronics, ComponentLink9Description=https://datasheet.ciiva.com/2989/product-2989390.pdf?src-supplier=Avnet, ComponentLink9URL=https://datasheet.ciiva.com/2989/product-2989390.pdf?src-supplier=Avnet, Depth=0.5mm, Height=0.5mm, Lead Free="Lead Free", Length=1mm, Mount="Surface Mount", Packaging="Tape and Reel", Pricing 1="1=0.10000, 10=0.05800, 100=0.02600, 500=0.01860, 1000=0.01461, 2500=0.01328, 5000=0.01222 (USD)", Radiation Hardening=No, REACH SVHC="No SVHC", RoHS=Yes, Stock 1=465669, Supplier 1=Digi-Key, Termination=SMD/SMT, Thickness=0.022inch, Voltage Rating=25V, Voltage Rating (DC)=25V, Width=0.02inch
C7: library part C-0402(1005), "Ceramic Capacitor, Multilayer, Ceramic, 25V, 1% +Tol, 1% -Tol, C0G, 30ppm/Cel TC, 0.000068uF, Surface Mount, 0402", Case Code (Imperial)=0402, Case Code (Metric)=1005, Dielectric=C0G, Manufacturer=KEMET, Manufacturer Part Number=CBR04C680F3GAC, Max Operating Temperature=125°C, Min Operating Temperature=-55°C, Package Quantity=10000, Supplier Part Number 1=399-11255-1-ND, Tolerance=1%, Voltage Rating=25V, Capacitance=68pF, Case/Package=0402, Category="Ceramic Capacitors", ComponentLink1Description=https://datasheet.ciiva.com/169/product-169683.pdf, ComponentLink1URL=https://datasheet.ciiva.com/169/product-169683.pdf, ComponentLink2Description=https://datasheet.ciiva.com:443/pdfs/VipMasterIC/IC/KEME/KEME-S-A0008534334/KEME-S-A0008534334-1.pdf?src-supplier=IHS+Markit, ComponentLink2URL=https://datasheet.ciiva.com:443/pdfs/VipMasterIC/IC/KEME/KEME-S-A0008534334/KEME-S-A0008534334-1.pdf?src-supplier=IHS+Markit, ComponentLink3Description=https://datasheet.ciiva.com/29542/docfinderpartnumber-cbr04c680f3gac-29542176.pdf?src-supplier=Digi-Key, ComponentLink3URL=https://datasheet.ciiva.com/29542/docfinderpartnumber-cbr04c680f3gac-29542176.pdf?src-supplier=Digi-Key, ComponentLink4Description=https://datasheet.ciiva.com/24220/kem-c1030-cbr-smd-346920-24220761.pdf?src-supplier=Mouser, ComponentLink4URL=https://datasheet.ciiva.com/24220/kem-c1030-cbr-smd-346920-24220761.pdf?src-supplier=Mouser, ComponentLink5Description=https://datasheet.ciiva.com/29542/kem-c1030-cbr-smd-29542174.pdf?src-supplier=Digi-Key, ComponentLink5URL=https://datasheet.ciiva.com/29542/kem-c1030-cbr-smd-29542174.pdf?src-supplier=Digi-Key, ComponentLink6Description=https://datasheet.ciiva.com/29542/kem-c1030-cbr-smd-29542175.pdf?src-supplier=Digi-Key, ComponentLink6URL=https://datasheet.ciiva.com/29542/kem-c1030-cbr-smd-29542175.pdf?src-supplier=Digi-Key, Height=0.5mm, Length=0.039inch, Mount="Surface Mount", Packaging="Tape and Reel", Pricing 1="1=0.61000, 10=0.43000, 100=0.28320, 500=0.20974, 1000=0.17829, 2500=0.16780, 5000=0.15731 (USD)", RoHS=Yes, Stock 1=36016, Supplier 1=Digi-Key, Termination=SMD/SMT, Thickness=0.022inch, Voltage Rating (DC)=25V, Weight=2.3E-05oz, Width=0.02inch
C8 C14 C24 C36 C37 C39 C41: library part C-0402(1005), "Ceramic Capacitor, Multilayer, Ceramic, 25V, 10% +Tol, 10% -Tol, X5R, 15% TC, 0.1uF, Surface Mount, 0402", Case Code (Imperial)=0402, Case Code (Metric)=1005, Dielectric=X5R, Manufacturer="Taiyo Yuden", Manufacturer Part Number=TMK105BJ104KV-F, Max Operating Temperature=85°C, Min Operating Temperature=-55°C, Package Quantity=1, Supplier Part Number 1=587-1456-1-ND, Tolerance=10%, Voltage=25V, Capacitance=100nF, Case/Package=0402, Category="Ceramic Capacitors", ComponentLink1Description=https://datasheet.ciiva.com/169/product-169683.pdf, ComponentLink1URL=https://datasheet.ciiva.com/169/product-169683.pdf, ComponentLink2Description=https://datasheet.ciiva.com:443/pdfs/VipMasterIC/IC/TAIY/TAIY-S-A0009103435/TAIY-S-A0009103038-1.pdf?src-supplier=IHS+Markit, ComponentLink2URL=https://datasheet.ciiva.com:443/pdfs/VipMasterIC/IC/TAIY/TAIY-S-A0009103435/TAIY-S-A0009103038-1.pdf?src-supplier=IHS+Markit, ComponentLink3Description=https://datasheet.ciiva.com/30051/25tmk105bj104kv-f-30051094.pdf?src-supplier=Onlinecomponents.com, ComponentLink3URL=https://datasheet.ciiva.com/30051/25tmk105bj104kv-f-30051094.pdf?src-supplier=Onlinecomponents.com, ComponentLink4Description=https://datasheet.ciiva.com/15922/28tmk105bj104kv-f-15922315.pdf?src-supplier=Onlinecomponents.com, ComponentLink4URL=https://datasheet.ciiva.com/15922/28tmk105bj104kv-f-15922315.pdf?src-supplier=Onlinecomponents.com, ComponentLink5Description=https://datasheet.ciiva.com/131/tmk105bj104kv-f-ss-131420.pdf?src-supplier=Digi-Key, ComponentLink5URL=https://datasheet.ciiva.com/131/tmk105bj104kv-f-ss-131420.pdf?src-supplier=Digi-Key, ComponentLink6Description=https://datasheet.ciiva.com/22768/1693457-22768649.pdf?src-supplier=Farnell, ComponentLink6URL=https://datasheet.ciiva.com/22768/1693457-22768649.pdf?src-supplier=Farnell, Composition=Ceramic, Depth=0.5mm, Halogen Free="Halogen Free", Height=0.5mm, Lead Free="Lead Free", Length=1mm, Mount="Surface Mount", Number of Pins=2, Packaging="Tape and Reel", Pricing 1="1=0.10000, 10=0.04600, 100=0.02050, 500=0.01464, 1000=0.01150, 2500=0.01045, 5000=0.00961 (USD)", REACH SVHC="No SVHC", RoHS=Yes, Stock 1=27456801, Supplier 1=Digi-Key, Termination=SMD/SMT, Thickness=0.022inch, Voltage Rating=25V, Voltage Rating (DC)=25V, Weight=2.3E-05oz, Width=0.5mm
C11: library part C-0402(1005), "Ceramic Capacitor, Multilayer, Ceramic, 25V, 5% +Tol, 5% -Tol, C0G, 30ppm/Cel TC, 0.002uF, Surface Mount, 0402", Case Code (Imperial)=0402, Case Code (Metric)=1005, Dielectric=C0G, Dielectric Material=Ceramic, Manufacturer=KEMET, Manufacturer Part Number=C0402C202J3GACTU, Max Operating Temperature=125°C, Min Operating Temperature=-55°C, Package Quantity=1, Supplier Part Number 1=399-9950-1-ND, Tolerance=5%, Voltage Rating=25V, Capacitance=2nF, Case/Package=0402, Category="Ceramic Capacitors", ComponentLink1Description=https://datasheet.ciiva.com/169/product-169683.pdf, ComponentLink1URL=https://datasheet.ciiva.com/169/product-169683.pdf, ComponentLink2Description=https://datasheet.ciiva.com:443/pdfs/VipMasterIC/IC/KEME/KEME-S-A0007617622/KEME-S-A0007609746-1.pdf?src-supplier=IHS+Markit, ComponentLink2URL=https://datasheet.ciiva.com:443/pdfs/VipMasterIC/IC/KEME/KEME-S-A0007617622/KEME-S-A0007609746-1.pdf?src-supplier=IHS+Markit, ComponentLink3Description=https://datasheet.ciiva.com/7747/1691965-7747484.pdf?src-supplier=Element14, ComponentLink3URL=https://datasheet.ciiva.com/7747/1691965-7747484.pdf?src-supplier=Element14, ComponentLink4Description=https://datasheet.ciiva.com/22693/1691965-22693900.pdf?src-supplier=Element14, ComponentLink4URL=https://datasheet.ciiva.com/22693/1691965-22693900.pdf?src-supplier=Element14, Depth=0.5mm, Lead Free="Lead Free", Lead Pitch=0.3mm, Length=0.039inch, Mount="Surface Mount", Number of Pins=2, Packaging="Cut Tape", Pricing 1="1=0.54000, 10=0.37900, 100=0.24970, 500=0.18496, 1000=0.15721, 2500=0.14796, 5000=0.13872 (USD)", REACH SVHC="No SVHC", RoHS=Yes, Stock 1=112214, Supplier 1=Digi-Key, Thickness=0.022inch, Voltage Rating (DC)=25V, Width=0.02inch
C12: library part C-0402(1005), "Ceramic Capacitor, Multilayer, Ceramic, 25V, 1% +Tol, 1% -Tol, C0G, -/+30ppm/Cel TC, 0.0001uF, 0402", Case Code (Imperial)=0402, Case Code (Metric)=1005, Dielectric=C0G, Manufacturer=KEMET, Manufacturer Part Number=CBR04C101F3GAC, Max Operating Temperature=125°C, Min Operating Temperature=-55°C, Package Quantity=10000, Supplier Part Number 1=399-11246-1-ND, Tolerance=1%, Voltage Rating=25V, Capacitance=100pF, Case/Package=0402, Category="Ceramic Capacitors", ComponentLink1Description=https://datasheet.ciiva.com/169/product-169683.pdf, ComponentLink1URL=https://datasheet.ciiva.com/169/product-169683.pdf, ComponentLink2Description=https://datasheet.ciiva.com:443/pdfs/VipMasterIC/IC/KEME/KEME-S-A0008534334/KEME-S-A0008534334-1.pdf?src-supplier=IHS+Markit, ComponentLink2URL=https://datasheet.ciiva.com:443/pdfs/VipMasterIC/IC/KEME/KEME-S-A0008534334/KEME-S-A0008534334-1.pdf?src-supplier=IHS+Markit, ComponentLink3Description=https://datasheet.ciiva.com/29541/docfinderpartnumber-cbr04c101f3gac-29541052.pdf?src-supplier=Digi-Key, ComponentLink3URL=https://datasheet.ciiva.com/29541/docfinderpartnumber-cbr04c101f3gac-29541052.pdf?src-supplier=Digi-Key, ComponentLink4Description=https://datasheet.ciiva.com/29541/kem-c1030-cbr-smd-29541054.pdf?src-supplier=Digi-Key, ComponentLink4URL=https://datasheet.ciiva.com/29541/kem-c1030-cbr-smd-29541054.pdf?src-supplier=Digi-Key, ComponentLink5Description=https://datasheet.ciiva.com/29541/kem-c1030-cbr-smd-29541053.pdf?src-supplier=Digi-Key, ComponentLink5URL=https://datasheet.ciiva.com/29541/kem-c1030-cbr-smd-29541053.pdf?src-supplier=Digi-Key, Contact Plating=Tin,Matte, Height=0.5mm, Lead Free="Lead Free", Length=1mm, Mount="Surface Mount", Packaging="Tape and Reel", Pricing 1="1=0.57000, 10=0.40300, 100=0.26540, 500=0.19660, 1000=0.16710, 2500=0.15727, 5000=0.14744 (USD)", RoHS=Yes, Stock 1=35333, Supplier 1=Digi-Key, Termination=SMD/SMT, Thickness=0.022inch, Voltage Rating (DC)=25V, Weight=2.3E-05oz, Width=0.5mm
C13: library part C-0402(1005), "Ceramic Capacitor, Multilayer, Ceramic, 25V, 5% +Tol, 5% -Tol, X7R, 15% TC, 0.01uF, Surface Mount, 0402", Case Code (Imperial)=0402, Case Code (Metric)=1005, Dielectric=X7R, Manufacturer=Yageo, Manufacturer Part Number=CC0402JRX7R8BB103, Max Operating Temperature=125°C, Min Operating Temperature=-55°C, Supplier Part Number 1=311-1677-1-ND, Tolerance=5%, Voltage Rating=25V, Capacitance=10nF, Case/Package=0402, Category="Ceramic Capacitors", ComponentLink1Description=https://datasheet.ciiva.com/169/product-169683.pdf, ComponentLink1URL=https://datasheet.ciiva.com/169/product-169683.pdf, ComponentLink2Description=https://datasheet.ciiva.com:443/pdfs/VipMasterIC/IC/YAGO/YAGO-S-A0003557223/YAGO-S-A0003557223-1.pdf?src-supplier=IHS+Markit, ComponentLink2URL=https://datasheet.ciiva.com:443/pdfs/VipMasterIC/IC/YAGO/YAGO-S-A0003557223/YAGO-S-A0003557223-1.pdf?src-supplier=IHS+Markit, ComponentLink3Description=https://datasheet.ciiva.com/13208/upy-gphc-x7r-6-3v-to-50v-8-12304-13208812.pdf?src-supplier=Mouser, ComponentLink3URL=https://datasheet.ciiva.com/13208/upy-gphc-x7r-6-3v-to-50v-8-12304-13208812.pdf?src-supplier=Mouser, ComponentLink4Description=https://datasheet.ciiva.com/17434/upy-gphc-x7r-6-3v-to-50v-8-17434365.pdf?src-supplier=Avnet+Europe, ComponentLink4URL=https://datasheet.ciiva.com/17434/upy-gphc-x7r-6-3v-to-50v-8-17434365.pdf?src-supplier=Avnet+Europe, Composition=Ceramic, Depth=0.5mm, Halogen Free="Halogen Free", Height=0.5mm, Lead Free="Lead Free", Length=1mm, Mount="Surface Mount", Packaging="Tape and Reel", Pricing 1="1=0.10000, 10=0.04200, 100=0.01890, 500=0.01348, 1000=0.01059, 2500=0.00962, 5000=0.00886 (USD)", Radiation Hardening=No, RoHS=Yes, Stock 1=22771, Supplier 1=Digi-Key, Termination=SMD/SMT, Thickness=0.022inch, Voltage Rating (DC)=25V, Weight=2.3E-05oz, Width=0.02inch
C15: library part C-0402(1005), "Ceramic Capacitor, Multilayer, Ceramic, 25V, 5% +Tol, 5% -Tol, X7R, 15% TC, 0.0047uF, Surface Mount, 0402", Case Code (Imperial)=0402, Case Code (Metric)=1005, Dielectric=X7R, Manufacturer=Yageo, Manufacturer Part Number=CC0402JRX7R8BB472, Max Operating Temperature=125°C, Min Operating Temperature=-55°C, Package Quantity=10000, Supplier Part Number 1=311-3761-1-ND, Tolerance=5%, Voltage Rating=25V, Capacitance=4.7nF, Case/Package=0402, Category="Ceramic Capacitors", ComponentLink1Description=https://datasheet.ciiva.com/169/product-169683.pdf, ComponentLink1URL=https://datasheet.ciiva.com/169/product-169683.pdf, ComponentLink2Description=https://datasheet.ciiva.com:443/pdfs/VipMasterIC/IC/YAGO/YAGO-S-A0003557223/YAGO-S-A0003557223-1.pdf?src-supplier=IHS+Markit, ComponentLink2URL=https://datasheet.ciiva.com:443/pdfs/VipMasterIC/IC/YAGO/YAGO-S-A0003557223/YAGO-S-A0003557223-1.pdf?src-supplier=IHS+Markit, ComponentLink3Description=https://datasheet.ciiva.com/5427/upy-gphc-x7r-6-3v-to-50v-8-12304-5427753.pdf?src-supplier=Mouser, ComponentLink3URL=https://datasheet.ciiva.com/5427/upy-gphc-x7r-6-3v-to-50v-8-12304-5427753.pdf?src-supplier=Mouser, Depth=0.5mm, Halogen Free="Halogen Free", Lead Free="Lead Free", Length=0.039inch, Mount="Surface Mount", Packaging="Tape and Reel", Pricing 1="1=0.10000, 10=0.03800, 100=0.01710, 500=0.01224, 1000=0.00962, 2500=0.00874, 5000=0.00805 (USD)", RoHS=Yes, Stock 1=13197, Supplier 1=Digi-Key, Termination=SMD/SMT, Thickness=0.022inch, Voltage Rating (DC)=25V, Width=0.02inch
C16 C17: library part C-0603(1608), "Ceramic Capacitor, Multilayer, Ceramic, 25V, 20% +Tol, 20% -Tol, X5R, 15% TC, 10uF, Surface Mount, 0603", Case Code (Imperial)=0603, Case Code (Metric)=1608, Dielectric=X5R, Manufacturer=Murata, Manufacturer Part Number=GRM188R61E106MA73J, Max Operating Temperature=85°C, Min Operating Temperature=-55°C, Package Quantity=10000, Supplier Part Number 1=490-12737-1-ND, Tolerance=20%, Voltage Rating=25V, Capacitance=10uF, Case/Package=0603, Category="Ceramic Capacitors", ComponentLink1Description=https://datasheet.ciiva.com/169/product-169683.pdf, ComponentLink1URL=https://datasheet.ciiva.com/169/product-169683.pdf, ComponentLink2Description=https://datasheet.ciiva.com:443/pdfs/VipMasterIC/IC/MURE/MURE-S-A0004349797/MURE-S-A0004352800-1.pdf?src-supplier=IHS+Markit, ComponentLink2URL=https://datasheet.ciiva.com:443/pdfs/VipMasterIC/IC/MURE/MURE-S-A0004349797/MURE-S-A0004352800-1.pdf?src-supplier=IHS+Markit, ComponentLink3Description=http://www.mouser.com/ds/2/281/GRM188R61E106MA73-01-1064626.pdf?src-supplier=Mouser, ComponentLink3URL=http://www.mouser.com/ds/2/281/GRM188R61E106MA73-01-1064626.pdf?src-supplier=Mouser, ComponentLink4Description=https://search.murata.co.jp/Ceramy/image/img/A01X/G101/ENG/GRM188R61E106MA73-01.pdf?src-supplier=Digi-Key, ComponentLink4URL=https://search.murata.co.jp/Ceramy/image/img/A01X/G101/ENG/GRM188R61E106MA73-01.pdf?src-supplier=Digi-Key, Composition=Ceramic, Height=0.8mm, Length=0.063inch, Mount="Surface Mount", Packaging="Tape and Reel", Pricing 1="1=0.46000, 10=0.32200, 100=0.19320, 500=0.14488, 1000=0.12235, 2500=0.11591, 5000=0.10947 (USD)", RoHS=Yes, Stock 1=57394, Supplier 1=Digi-Key, Termination=SMD/SMT, Thickness=0.039inch, Voltage Rating (DC)=25V, Weight=0.000222oz, Width=0.031inch
C18: library part C-0603(1608), "Ceramic Capacitor, Multilayer, Ceramic, 25V, 80% +Tol, 20% -Tol, Y5V, -82/+22% TC, 0.1uF, Surface Mount, 0402", Case Code (Imperial)=0402, Case Code (Metric)=1005, Dielectric=Y5V, Insulation Resistance=10GR, Manufacturer=Yageo, Manufacturer Part Number=CC0402ZRY5V8BB104, Max Operating Temperature=85°C, Min Operating Temperature=-30°C, Package Quantity=1, Supplier Part Number 1=311-1375-1-ND, Tolerance=80%, Voltage Rating=25V, Capacitance=100nF, Case/Package=0402, Category="Ceramic Capacitors", ComponentLink1Description=https://datasheet.ciiva.com/169/product-169683.pdf, ComponentLink1URL=https://datasheet.ciiva.com/169/product-169683.pdf, ComponentLink2Description=https://datasheet.ciiva.com:443/pdfs/VipMasterIC/IC/YAGO/YAGO-S-A0004841839/YAGO-S-A0004841839-1.pdf?src-supplier=IHS+Markit, ComponentLink2URL=https://datasheet.ciiva.com:443/pdfs/VipMasterIC/IC/YAGO/YAGO-S-A0004841839/YAGO-S-A0004841839-1.pdf?src-supplier=IHS+Markit, ComponentLink3Description=https://datasheet.ciiva.com/144/mlccorderingcode-144022.pdf?src-supplier=Digi-Key, ComponentLink3URL=https://datasheet.ciiva.com/144/mlccorderingcode-144022.pdf?src-supplier=Digi-Key, ComponentLink4Description=https://datasheet.ciiva.com/144/mlccorderingcode-144023.pdf?src-supplier=Digi-Key, ComponentLink4URL=https://datasheet.ciiva.com/144/mlccorderingcode-144023.pdf?src-supplier=Digi-Key, ComponentLink5Description=https://datasheet.ciiva.com/144/mlccorderingcode-144024.pdf?src-supplier=Digi-Key, ComponentLink5URL=https://datasheet.ciiva.com/144/mlccorderingcode-144024.pdf?src-supplier=Digi-Key, ComponentLink6Description=https://datasheet.ciiva.com/7978/1132289-7978124.pdf?src-supplier=Element14, ComponentLink6URL=https://datasheet.ciiva.com/7978/1132289-7978124.pdf?src-supplier=Element14, ComponentLink7Description=https://datasheet.ciiva.com/11586/upy-gphc-y5v-6-3v-to-50v-5-11586526.pdf?src-supplier=Avnet, ComponentLink7URL=https://datasheet.ciiva.com/11586/upy-gphc-y5v-6-3v-to-50v-5-11586526.pdf?src-supplier=Avnet, ComponentLink8Description=https://datasheet.ciiva.com/17437/upy-gphc-y5v-6-3v-to-50v-5-17437230.pdf?src-supplier=Avnet+Europe, ComponentLink8URL=https://datasheet.ciiva.com/17437/upy-gphc-y5v-6-3v-to-50v-5-17437230.pdf?src-supplier=Avnet+Europe, Composition=Ceramic, Depth=0.5mm, Dissipation Factor=12.5%, Halogen Free="Halogen Free", Height=0.5mm, Lead Free="Lead Free", Length=1mm, Mount="Surface Mount", Number of Pins=2, Packaging="Tape and Reel", Pricing 1="1=0.10000, 10=0.03200, 100=0.01440, 500=0.01028, 1000=0.00808, 2500=0.00734, 5000=0.00676 (USD)", Radiation Hardening=No, REACH SVHC=Unknown, RoHS=Yes, Stock 1=3200380, Supplier 1=Digi-Key, Termination=SMD/SMT, Thickness=0.022inch, Voltage Rating (DC)=25V, Weight=2.3E-05oz, Width=0.02inch
C20 C21 C28 C32: library part C-0402(1005), "0402 10 V 4.7 uF ±20% Tolerance X5R Multilayer Ceramic Chip Capacitor", Case Code (Imperial)=0402, Case Code (Metric)=1005, Manufacturer=Murata, Manufacturer Part Number=GRM155R61A475MEAAD, Max Operating Temperature=85°C, Min Operating Temperature=-55°C, Supplier Part Number 1=490-14306-1-ND, Tolerance=20%, Voltage Rating=10V, Capacitance=4.7uF, Case/Package=0402, Category="Ceramic Capacitors", ComponentLink1Description=https://datasheet.ciiva.com/169/product-169683.pdf, ComponentLink1URL=https://datasheet.ciiva.com/169/product-169683.pdf, ComponentLink2Description=https://psearch.en.murata.com:443/capacitor/product/GRM155R61A475MEAA%23.pdf?src-supplier=IHS+Markit, ComponentLink2URL=https://psearch.en.murata.com:443/capacitor/product/GRM155R61A475MEAA%23.pdf?src-supplier=IHS+Markit, ComponentLink3Description=http://www.farnell.com/datasheets/2189109.pdf?src-supplier=Farnell, ComponentLink3URL=http://www.farnell.com/datasheets/2189109.pdf?src-supplier=Farnell, ComponentLink4Description=https://search.murata.co.jp/Ceramy/image/img/A01X/G101/ENG/GRM155R61A475MEAA-01.pdf?src-supplier=Digi-Key, ComponentLink4URL=https://search.murata.co.jp/Ceramy/image/img/A01X/G101/ENG/GRM155R61A475MEAA-01.pdf?src-supplier=Digi-Key, ComponentLink5Description=http://www.farnell.com/datasheets/2189109.pdf?src-supplier=Element14, ComponentLink5URL=http://www.farnell.com/datasheets/2189109.pdf?src-supplier=Element14, ComponentLink6Description=http://www.farnell.com/datasheets/2189109.pdf?src-supplier=Newark, ComponentLink6URL=http://www.farnell.com/datasheets/2189109.pdf?src-supplier=Newark, ComponentLink7Description=http://datasheet.octopart.com/GRM155R61A475MEAAD-Murata-datasheet-138740730.pdf?src-supplier=Ciiva+Crawler, ComponentLink7URL=http://datasheet.octopart.com/GRM155R61A475MEAAD-Murata-datasheet-138740730.pdf?src-supplier=Ciiva+Crawler, ComponentLink8Description=http://datasheet.octopart.com/GRM155R61A475MEAAD-Murata-datasheet-140690084.pdf?src-supplier=Ciiva+Crawler, ComponentLink8URL=http://datasheet.octopart.com/GRM155R61A475MEAAD-Murata-datasheet-140690084.pdf?src-supplier=Ciiva+Crawler, ComponentLink9Description=http://datasheet.octopart.com/GRM155R61A475MEAAD-Murata-datasheet-68589269.pdf?src-supplier=Newark, ComponentLink9URL=http://datasheet.octopart.com/GRM155R61A475MEAAD-Murata-datasheet-68589269.pdf?src-supplier=Newark, ComponentLink10Description=http://datasheet.octopart.com/GRM155R61A475MEAAD-Murata-datasheet-8819587.pdf, ComponentLink10URL=http://datasheet.octopart.com/GRM155R61A475MEAAD-Murata-datasheet-8819587.pdf, ComponentLink11Description=http://datasheet.octopart.com/GRM155R61A475MEAAD-Murata-datasheet-10025737.pdf, ComponentLink11URL=http://datasheet.octopart.com/GRM155R61A475MEAAD-Murata-datasheet-10025737.pdf, ComponentLink12Description=http://datasheet.octopart.com/GRM155R61A475MEAAD-Murata-datasheet-11978611.pdf, ComponentLink12URL=http://datasheet.octopart.com/GRM155R61A475MEAAD-Murata-datasheet-11978611.pdf, ComponentLink13Description=http://datasheet.octopart.com/GRM155R61A475MEAAD-Murata-datasheet-12510076.pdf, ComponentLink13URL=http://datasheet.octopart.com/GRM155R61A475MEAAD-Murata-datasheet-12510076.pdf, ComponentLink14Description=http://datasheet.octopart.com/GRM155R61A475MEAAD-Murata-datasheet-12515295.pdf, ComponentLink14URL=http://datasheet.octopart.com/GRM155R61A475MEAAD-Murata-datasheet-12515295.pdf, Mount="Surface Mount", Packaging="Tape and Reel", Pricing 1="1=0.25000, 10=0.16900, 100=0.08560, 500=0.05854, 1000=0.05179, 2500=0.04954, 5000=0.04503 (USD)", Stock 1=420733, Supplier 1=Digi-Key
C22 C23: library part C-0402(1005), "Ceramic Capacitor, Multilayer, Ceramic, 50V, 1% +Tol, 1% -Tol, C0G, 30ppm/Cel TC, 0.000012uF, Surface Mount, 0402", Case Code (Imperial)=0402, Case Code (Metric)=1005, Dielectric=C0G, Manufacturer="Kyocera AVX", Manufacturer Part Number=04025U120FAT2A, Max Operating Temperature=125°C, Min Operating Temperature=-55°C, Package Quantity=10000, Supplier Part Number 1=478-10136-1-ND, Tolerance=1%, Voltage Rating=50V, Capacitance=12pF, Case/Package=0402, Category="Ceramic Capacitors", ComponentLink1Description=https://datasheet.ciiva.com/169/product-169683.pdf, ComponentLink1URL=https://datasheet.ciiva.com/169/product-169683.pdf, ComponentLink2Description=https://datasheet.ciiva.com:443/pdfs/VipMasterIC/IC/AVXC/AVXC-S-A0008668660/AVXC-S-A0008668660-1.pdf?src-supplier=IHS+Markit, ComponentLink2URL=https://datasheet.ciiva.com:443/pdfs/VipMasterIC/IC/AVXC/AVXC-S-A0008668660/AVXC-S-A0008668660-1.pdf?src-supplier=IHS+Markit, ComponentLink3Description=https://datasheet.ciiva.com/16327/useries-16327642.pdf?src-supplier=Future+Electronics, ComponentLink3URL=https://datasheet.ciiva.com/16327/useries-16327642.pdf?src-supplier=Future+Electronics, ComponentLink4Description=https://datasheet.ciiva.com/11568/useries-11568940.pdf?src-supplier=Avnet, ComponentLink4URL=https://datasheet.ciiva.com/11568/useries-11568940.pdf?src-supplier=Avnet, Composition=Ceramic, Depth=0.5mm, Height=0.02mm, Lead Free="Lead Free", Length=1mm, Mount="Surface Mount", Packaging="Tape and Reel", Pricing 1="1=0.33000, 10=0.22700, 100=0.13630, 500=0.10220, 1000=0.08630, 2500=0.08176, 5000=0.07721 (USD)", Radiation Hardening=No, RoHS=Yes, Stock 1=30880, Supplier 1=Digi-Key, Termination=SMD/SMT, Thickness=0.022inch, Voltage Rating (DC)=50V, Weight=2.3E-05oz, Width=0.02inch
C25 C33 C35 C38 C40: library part C-0402(1005), "Ceramic Capacitor, Multilayer, Ceramic, 6.3V, 20% +Tol, 20% -Tol, X5R, 15% TC, 1uF, Surface Mount, 0402", Case Code (Imperial)=0402, Case Code (Metric)=1005, Dielectric=X5R, Manufacturer=Yageo, Manufacturer Part Number=CC0402MRX5R5BB105, Max Operating Temperature=85°C, Min Operating Temperature=-55°C, Package Quantity=1, Supplier Part Number 1=311-1441-1-ND, Tolerance=20%, Voltage Rating=6.3V, Capacitance=1uF, Case/Package=0402, Category="Ceramic Capacitors", ComponentLink1Description=https://datasheet.ciiva.com/169/product-169683.pdf, ComponentLink1URL=https://datasheet.ciiva.com/169/product-169683.pdf, ComponentLink2Description=https://datasheet.ciiva.com:443/pdfs/VipMasterIC/IC/YAGO/YAGO-S-A0006851646/YAGO-S-A0006851646-1.pdf?src-supplier=IHS+Markit, ComponentLink2URL=https://datasheet.ciiva.com:443/pdfs/VipMasterIC/IC/YAGO/YAGO-S-A0006851646/YAGO-S-A0006851646-1.pdf?src-supplier=IHS+Markit, ComponentLink3Description=https://datasheet.ciiva.com/176/mlccorderingcode-176806.pdf?src-supplier=Digi-Key, ComponentLink3URL=https://datasheet.ciiva.com/176/mlccorderingcode-176806.pdf?src-supplier=Digi-Key, ComponentLink4Description=https://datasheet.ciiva.com/176/mlccorderingcode-176807.pdf?src-supplier=Digi-Key, ComponentLink4URL=https://datasheet.ciiva.com/176/mlccorderingcode-176807.pdf?src-supplier=Digi-Key, ComponentLink5Description=https://datasheet.ciiva.com/176/mlccorderingcode-176808.pdf?src-supplier=Digi-Key, ComponentLink5URL=https://datasheet.ciiva.com/176/mlccorderingcode-176808.pdf?src-supplier=Digi-Key, Composition=Ceramic, Depth=0.5mm, Dissipation Factor=10%, Halogen Free="Halogen Free", Height=0.5mm, Lead Free="Lead Free", Length=1mm, Mount="Surface Mount", Number of Pins=2, Packaging="Tape and Reel", Pricing 1="1=0.13000, 10=0.08900, 100=0.04200, 500=0.02946, 1000=0.02439, 2500=0.02270, 5000=0.02076 (USD)", RoHS=Yes, Stock 1=16697, Supplier 1=Digi-Key, Termination=SMD/SMT, Thickness=0.022inch, Voltage Rating (DC)=6.3V, Width=0.5mm